# EAGLE board CycloneSpindleCntl_v1.2_SMD (EAGLE 6.3)
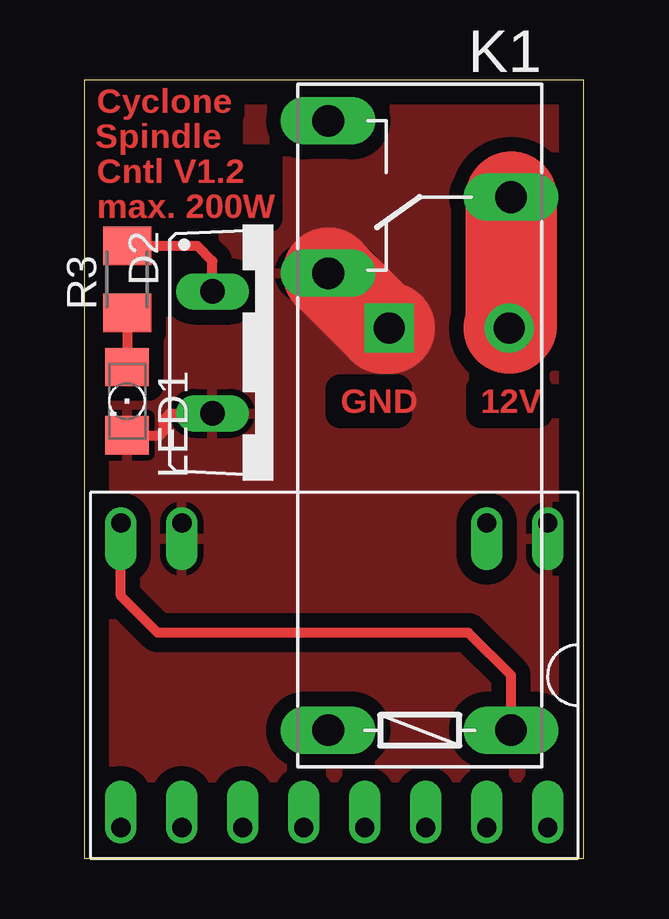
[diagram p0: board, top side]
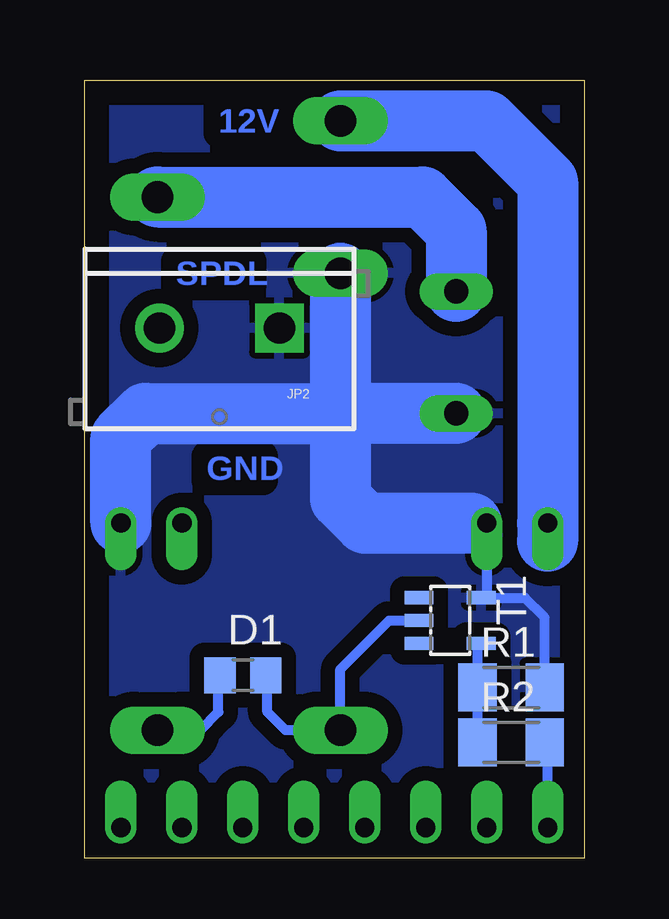
[diagram p1: board, bottom side, seen from below]

Size 20.81 x 32.44 mm. Coordinates in mm from the lower left corner, seen from the top.
Outline: 0,0 20.81,0 20.81,32.44 0,32.44 0,0
Copper layers (1*16): Top 0.035mm / dielectric 1.5mm / Bottom 0.035mm
Design rules "default": minimum track width 10mil, minimum drill 24mil, track to track 8mil, track to pad 8mil, pad to pad 8mil, via to via 8mil, smd to smd 8mil, copper to edge 40mil, drill to drill 8mil, minimum pad ring 10mil, minimum via ring 8mil, stop-mask expansion 4mil, vias tented up to drill 0mil, thermal gap 10mil

## Footprints (pad centres in the part's own frame; a part is rotated, then mirrored left to right if it is on the bottom)
R0805 = smd 1.3 x 1.5: A 0.95,0; K -0.95,0
TO220ACS = drill 1.016 long: A 2.54,-2.54; C -2.54,-2.54
SCREWTERMINAL-5MM-2 = drill 1.3 pad 2.032 square: 1 0,0 | drill 1.3 pad 2.032: 2 5,0
G6RW = drill 1.321 long: 1 -12.7,-3.81; 2 -12.7,3.81; O 6.35,3.81; P 9.525,-3.81; S 12.7,3.81
1206 = smd 1.6 x 1.803: A -1.422,0; C 1.422,0
M1206 = smd 1.6 x 2: 1 -1.4,0; 2 1.4,0
SOT23-5L = smd 0.55 x 1.2: 1 -0.95,-1.3; 2 0,-1.3; 3 0.95,-1.3; 4 0.95,1.3; 5 -0.95,1.3
DIL16_MOD = drill 0.8 offset: 1 0,0; 2 0,-2.54; 7 0,-15.24; 8 0,-17.78; 9 12.7,-17.78; 10 12.7,-15.24; 11 12.7,-12.7; 12 12.7,-10.16; 13 12.7,-7.62; 14 12.7,-5.08; 15 12.7,-2.54; 16 12.7,0

## Placement (x,y rotation side)
D1  1N4148  [R0805]  14.22,7.62 0 bottom
D2  MBR1645  [TO220ACS]  7.87,21.08 270 top
JP2  Spindle  [SCREWTERMINAL-5MM-2]  12.7,22.1 180 bottom
K1  G6RW  [G6RW]  13.97,18.03 90 top
LED1  [1206]  1.78,19.05 270 top
R1  100k  [M1206]  3.05,7.11 0 bottom
R2  22R  [M1206]  3.05,4.83 0 bottom
R3  22R  [M1206]  1.78,24.13 90 top
T1  BSS138  [SOT23-5L]  5.59,9.91 270 bottom
U$1  SPINDLEDRIVERSTICK  [DIL16_MOD]  19.3,13.97 270 top

## Library data of the parts
D1 T1 = belichter
D2 = diode
JP2 = SparkFun-Connectors
K1 = relay; OC_FARNELL: unknown; OC_NEWARK: unknown
LED1 = led
R1-R3 = rcl
U$1 = reprap

## Nets
+5V: U$1.2
+12V: D1.K K1.1 K1.S U$1.8
GND: D2.A JP2.1 K1.O LED1.C R1.2 T1.5 U$1.1 U$1.7
N$1: LED1.A R3.1
N$5: D1.A K1.2 T1.2
N$7: R1.1 R2.1 T1.4
N$9: D2.C JP2.2 K1.P R3.2
N$11: R2.2 U$1.9

## Tracks (layer width: path | path; a pad name or v marks a point on that pad's centre or on a via)
+12V
  Top 0.406: K1.1 17.78,7.62 16,9.4 3.05,9.4 1.52,10.92 U$1.8
  Bottom 0.406: K1.1 16,5.33 15.24,6.1 15.24,7.55 D1.K
  Bottom 2.54: K1.S 4.06,30.73 1.52,28.19 U$1.8 1.52,13.21
GND
  Top 0.406: LED1.C 3.15,17.63 3.3,17.78 3.3,18.29 3.56,18.54 D2.A
  Top 3.81: JP2.1 12.45,22.1 K1.O
  Bottom 0.406: R1.2 1.65,10.03 2.47,10.86 T1.5 4.06,11.08 U$1.7 4.7,13.97
  Bottom 2.54: K1.O 10.16,18.54 | 10.16,18.54 10.16,14.99 9.14,13.97 4.7,13.97 | D2.A 10.16,18.54 | U$1.1 19.3,17.53 18.29,18.54 10.16,18.54
  pour Bottom (isolate 0.61): 0,32.51 20.83,32.51 20.83,0 0,0
  pour Top (isolate 0.61): 0,32.51 20.83,32.51 20.83,0 0,0
N$1
  Top 0.406: R3.1 LED1.A
N$5
  Bottom 0.406: D1.A 13.21,7.55 13.21,6.1 12.45,5.33 K1.2 10.16,7.87 8.13,9.91 T1.2
N$7
  Bottom 0.406: R2.1 R1.1 4.45,8.8 T1.4
N$9
  Top 0.406: D2.C 5.33,24.89 4.7,25.53 R3.2
  Top 3.81: K1.P 17.78,22.18 JP2.2
  Bottom 2.54: K1.P 6.73,27.56 5.33,26.16 D2.C
N$11
  Bottom 0.406: U$1.9 1.52,4.7 R2.2

## Text on the board
Top: Cyclone | Spindle | Cntl V1.2 | max. 200W | GND | 12V
Bottom: 12V | SPDL | GND